# EAGLE board dueSkel (EAGLE 8.2.2)
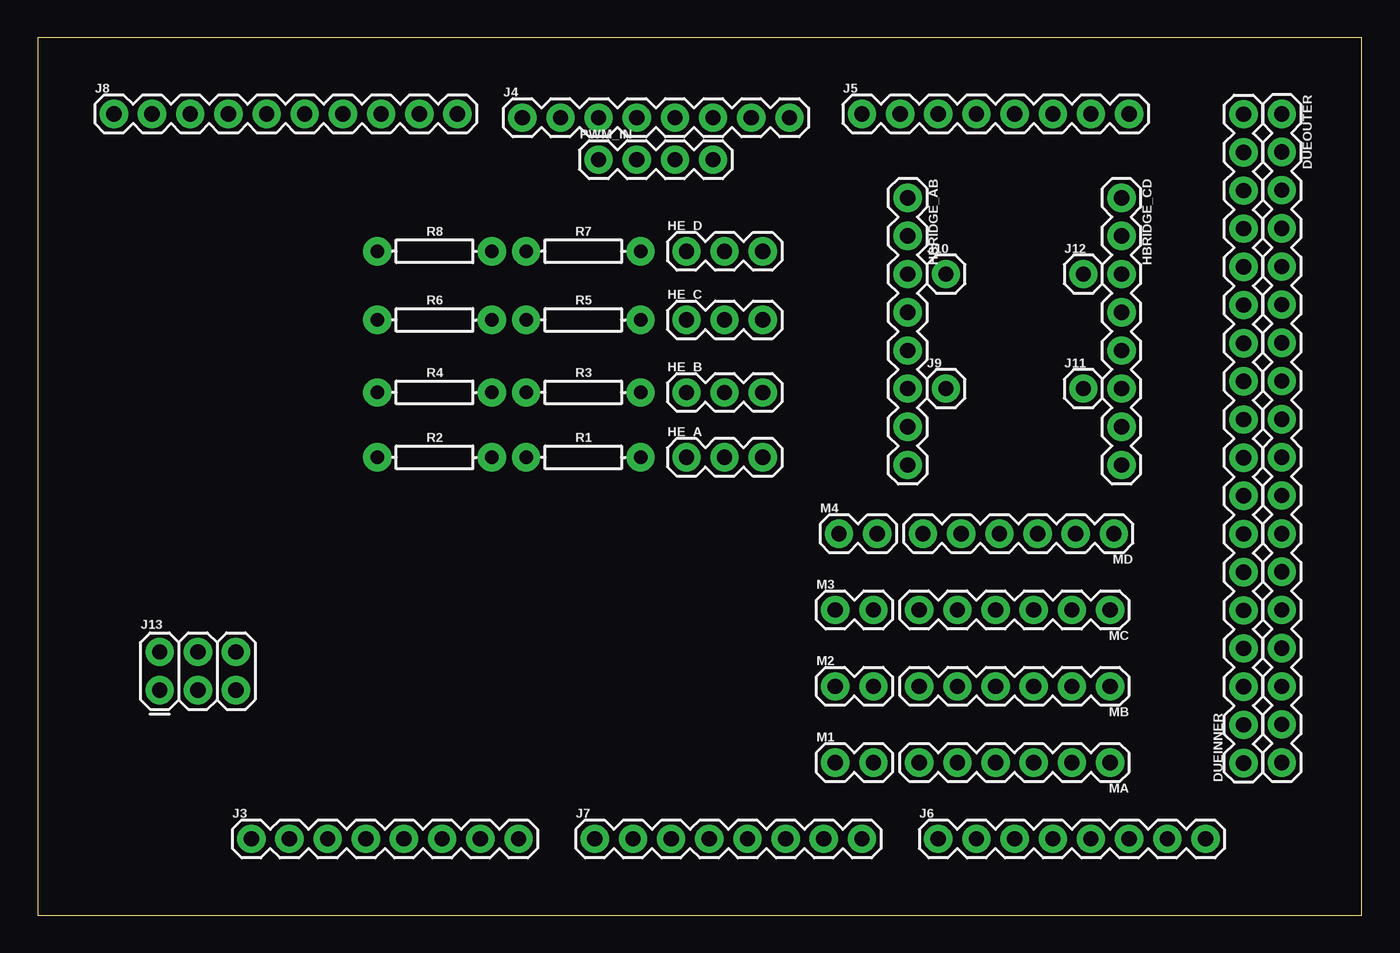
[diagram p0: board, top side]
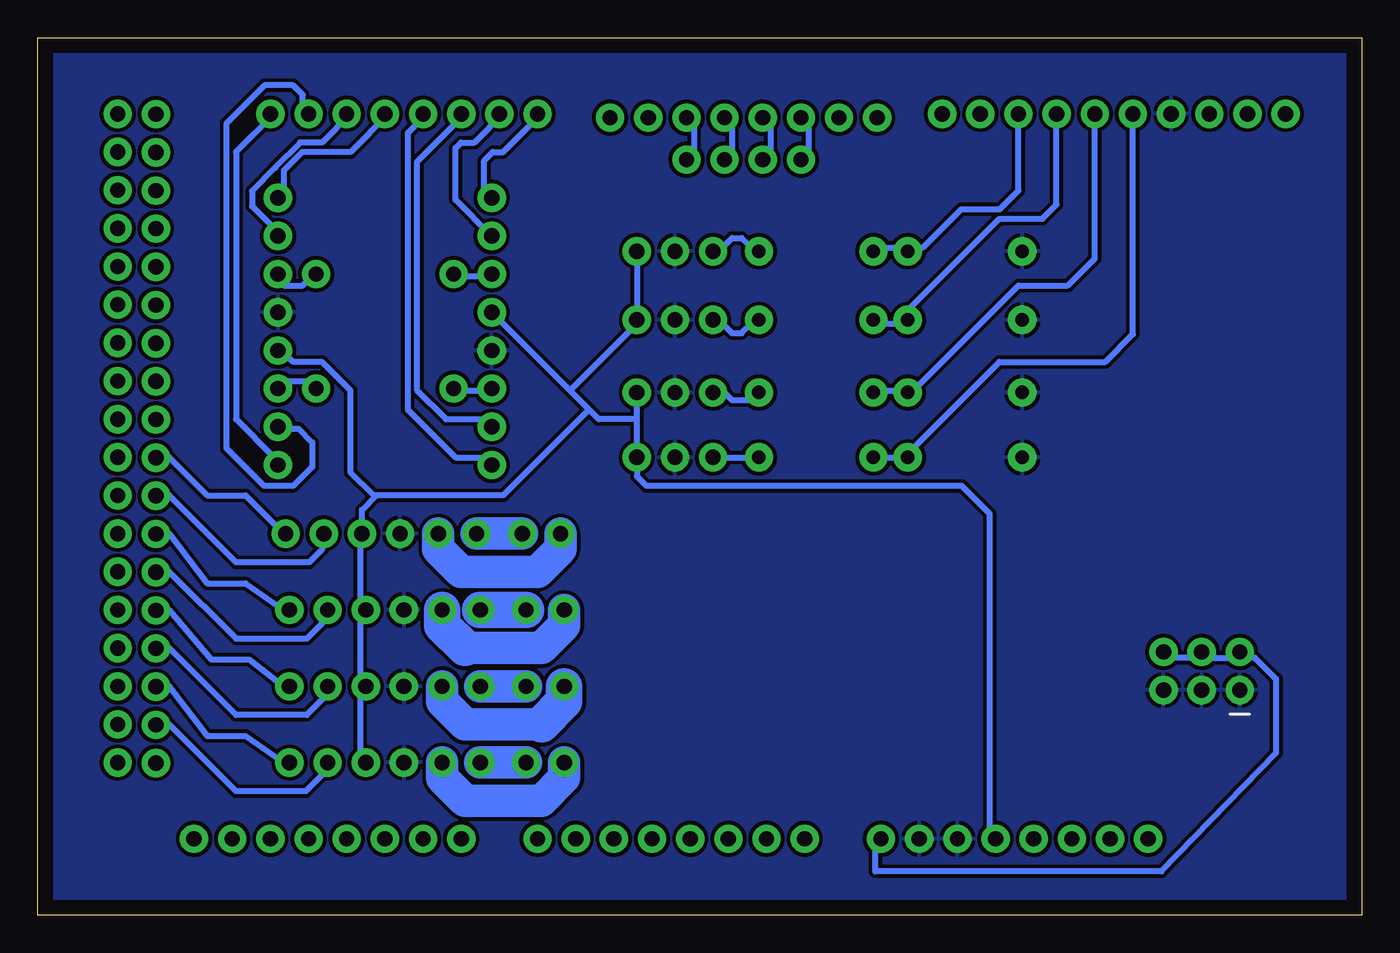
[diagram p1: board, bottom side, seen from below]

Size 88.14 x 58.42 mm. Coordinates in mm from the lower left corner, seen from the top.
Outline: 0,0 88.14,0 88.14,58.42 0,58.42 0,0
Copper layers (1*16): Top 0.035mm / dielectric 1.5mm / Bottom 0.035mm
Design rules "default *": minimum track width 16mil, minimum drill 0.35mm, track to track 6mil, track to pad 6mil, pad to pad 6mil, via to via 6mil, smd to smd 6mil, copper to edge 40mil, drill to drill 6mil, minimum pad ring 10mil, minimum via ring 8mil, stop-mask expansion 4mil, vias tented up to drill 0mil, thermal gap 10mil

## Footprints (pad centres in the part's own frame; a part is rotated, then mirrored left to right if it is on the bottom)
1X18 = drill 1.016 pad 1.88: 1 0,0; 2 2.54,0; 3 5.08,0; 4 7.62,0; 5 10.16,0; 6 12.7,0; 7 15.24,0; 8 17.78,0; 9 20.32,0; 10 22.86,0; 11 25.4,0; 12 27.94,0; 13 30.48,0; 14 33.02,0; 15 35.56,0; 16 38.1,0; 17 40.64,0; 18 43.18,0
1X08 = drill 1.016 pad 1.88: 1 0,0; 2 2.54,0; 3 5.08,0; 4 7.62,0; 5 10.16,0; 6 12.7,0; 7 15.24,0; 8 17.78,0
1X03 = drill 1.016 pad 1.88: 1 0,0; 2 2.54,0; 3 5.08,0
1X10 = drill 1.016 pad 1.88: 1 0,0; 2 2.54,0; 3 5.08,0; 4 7.62,0; 5 10.16,0; 6 12.7,0; 7 15.24,0; 8 17.78,0; 9 20.32,0; 10 22.86,0
1X01 = drill 1.016 pad 1.88: 1 0,0
2X3 = drill 1.016 pad 1.88: 1 0,0; 2 0,2.54; 3 2.54,0; 4 2.54,2.54; 5 5.08,0; 6 5.08,2.54
1X02 = drill 1.016 pad 1.88: 1 0,0; 2 2.54,0
1X06 = drill 1.016 pad 1.88: 1 0,0; 2 2.54,0; 3 5.08,0; 4 7.62,0; 5 10.16,0; 6 12.7,0
1X04 = drill 1.016 pad 1.88: 1 0,0; 2 2.54,0; 3 5.08,0; 4 7.62,0
AXIAL-0.3 = drill 0.9 pad 1.88: P$1 -3.81,0; P$2 3.81,0

## Placement (x,y rotation side)
DUEINNER  [1X18]  80.26,10.13 90 top
DUEOUTER  [1X18]  82.8,53.34 270 top
HBRIDGE_AB  [1X08]  57.91,47.75 270 top
HBRIDGE_CD  [1X08]  72.14,47.75 270 top
HE_A  [1X03]  43.18,30.48 0 top
HE_B  [1X03]  43.18,34.8 0 top
HE_C  [1X03]  43.18,39.62 0 top
HE_D  [1X03]  43.18,44.2 0 top
J3  [1X08]  14.22,5.08 0 top
J4  [1X08]  32.26,53.09 0 top
J5  [1X08]  54.86,53.34 0 top
J6  [1X08]  59.94,5.08 0 top
J7  [1X08]  37.08,5.08 0 top
J8  [1X10]  5.08,53.34 0 top
J9  [1X01]  60.45,35.05 0 top
J10  [1X01]  60.45,42.67 0 top
J11  [1X01]  69.6,35.05 0 top
J12  [1X01]  69.6,42.67 0 top
J13  FEMALE 2x3  [2X3]  8.13,14.99 0 top
M1  [1X02]  53.09,10.16 0 top
M2  [1X02]  53.09,15.24 0 top
M3  [1X02]  53.09,20.32 0 top
M4  [1X02]  53.34,25.4 0 top
MA  [1X06]  71.37,10.16 180 top
MB  [1X06]  71.37,15.24 180 top
MC  [1X06]  71.37,20.32 180 top
MD  [1X06]  71.63,25.4 180 top
PWM_IN  [1X04]  37.34,50.29 0 top
R1  10  [AXIAL-0.3]  36.32,30.48 0 top
R2  10  [AXIAL-0.3]  26.42,30.48 0 top
R3  10  [AXIAL-0.3]  36.32,34.8 0 top
R4  10  [AXIAL-0.3]  26.42,34.8 0 top
R5  10  [AXIAL-0.3]  36.32,39.62 0 top
R6  10  [AXIAL-0.3]  26.42,39.62 0 top
R7  10  [AXIAL-0.3]  36.32,44.2 0 top
R8  10  [AXIAL-0.3]  26.42,44.2 0 top

## Library data of the parts
DUEINNER DUEOUTER HE_A HE_B HE_C HE_D J9-J12 M1-M4 = SparkFun-Connectors
HBRIDGE_AB HBRIDGE_CD J3-J7 = SparkFun-Connectors; PROD_ID: CONN-08438
J8 = SparkFun-Connectors; PROD_ID: CONN-11563
J13 = SparkFun-Connectors; PROD_ID: CONN-11566
MA MB MC MD = SparkFun-Connectors; PROD_ID: CONN-08437
PWM_IN = SparkFun-Connectors; PROD_ID: CONN-09696
R1-R8 = SparkFun-Resistors; PROD_ID: RES-12180

## Nets
3.3V: J3.4
5V: HBRIDGE_AB.4 HBRIDGE_CD.5 HE_A.3 HE_B.3 HE_C.3 HE_D.3 J3.5 MA.3 MB.3 MC.3 MD.3
A0: J7.1
A1: J7.2
A2: J7.3
A3: J7.4
A4: J7.5
A5: J7.6
A6: J7.7
A7: J7.8
A8: J6.1
A9: J6.2
A10: J6.3
A11: J6.4
AREF: J8.3
CANRX: J6.7
CANTX: J6.8
D0: J4.8
D1: J4.7
D2: J4.6 PWM_IN.4
D3: J4.5 PWM_IN.3
D4: J4.4 PWM_IN.2
D5: J4.3 PWM_IN.1
D6: J4.2
D7: J4.1
D8: J8.10
D9: J8.9
D10: J8.8 R7.P$1 R8.P$2
D11: J8.7 R5.P$1 R6.P$2
D12: J8.6 R3.P$1 R4.P$2
D13: J8.5 R1.P$1 R2.P$2
D14: HBRIDGE_AB.1 J5.1
D15: HBRIDGE_AB.2 J5.2
D16: HBRIDGE_AB.7 J5.3
D17: HBRIDGE_AB.8 J5.4
D18: HBRIDGE_CD.1 J5.5
D19: HBRIDGE_CD.2 J5.6
D20: HBRIDGE_CD.7 J5.7
D21: HBRIDGE_CD.8 J5.8
D22: DUEINNER.17
D23: DUEOUTER.2
D24: DUEINNER.16
D25: DUEOUTER.3
D26: DUEINNER.15
D27: DUEOUTER.4
D28: DUEINNER.14
D29: DUEOUTER.5
D30: DUEINNER.13
D31: DUEOUTER.6
D32: DUEINNER.12
D33: DUEOUTER.7
D34: DUEINNER.11
D35: DUEOUTER.8
D36: DUEINNER.10
D37: DUEOUTER.9
D38: DUEINNER.9 MD.1
D39: DUEOUTER.10
D40: DUEINNER.8 MD.2
D41: DUEOUTER.11
D42: DUEINNER.7 MC.1
D43: DUEOUTER.12
D44: DUEINNER.6 MC.2
D45: DUEOUTER.13
D46: DUEINNER.5 MB.1
D47: DUEOUTER.14
D48: DUEINNER.4 MB.2
D49: DUEOUTER.15
D50: DUEINNER.3 MA.1
D51: DUEOUTER.16
D52: DUEINNER.2 MA.2
D53: DUEOUTER.17
DAC0: J6.5
DAC1: J6.6
GND: HBRIDGE_AB.5 HBRIDGE_CD.4 HE_A.2 HE_B.2 HE_C.2 HE_D.2 J3.6 J3.7 J8.4 J13.1 J13.3 J13.5 MA.4 MB.4 MC.4 MD.4 R2.P$1 R4.P$1 R6.P$1 R8.P$1
HB1_PWM1: HBRIDGE_AB.6 J9.1
HB1_PWM2: HBRIDGE_AB.3 J10.1
HB2_PWM1: HBRIDGE_CD.6 J11.1
HB2_PWM2: HBRIDGE_CD.3 J12.1
IOREF: J3.2
M1A: M1.2 MA.6
M1B: M1.1 MA.5
M2A: M2.2 MB.6
M2B: M2.1 MB.5
M3A: M3.2 MC.6
M3B: M3.1 MC.5
M4A: M4.2 MD.6
M4B: M4.1 MD.5
N$3: HE_A.1 R1.P$2
N$6: HE_B.1 R3.P$2
N$9: HE_C.1 R5.P$2
N$12: HE_D.1 R7.P$2
RESET: J3.3
SCL1: J8.1
SDA1: J8.2
VIN: J3.8 J13.2 J13.4 J13.6

## Tracks (layer width: path | path; a pad name or v marks a point on that pad's centre or on a via)
5V
  Bottom 0.406: 66.67,15.24 66.67,10.16 MA.3 | 66.67,20.32 66.67,25.4 MD.3 66.55,26.98 | HBRIDGE_CD.5 71.75,37.46 71.12,36.83 69.21,36.83 67.31,34.92 67.31,29.48 65.79,27.96 65.79,27.94 65.6,27.94 | 66.67,20.32 66.67,15.24 | 66.67,15.24 MB.3 | 66.67,20.32 MC.3 | HE_D.3 HE_C.3 48.26,39.37 52.71,34.92 | J3.5 24.77,5.08 24.77,26.72 26.62,28.57 47.62,28.57 48.26,29.21 HE_A.3 48.26,33.02 | 48.26,33.02 HE_B.3 | 51.44,33.65 50.8,33.02 48.26,33.02 | 51.44,33.65 52.71,34.92 | 52.71,34.92 HBRIDGE_AB.4 | 65.6,27.94 57.15,27.94 51.44,33.65 | 66.55,26.98 65.6,27.94 | 66.55,26.98 | 66.55,26.98
D2
  Bottom 0.406: PWM_IN.4 44.45,50.8 44.45,52.7 J4.6
D3
  Bottom 0.406: PWM_IN.3 41.91,50.8 41.91,52.7 J4.5
D4
  Bottom 0.406: PWM_IN.2 39.37,50.8 39.37,52.7 J4.4
D5
  Bottom 0.406: PWM_IN.1 36.83,50.8 36.83,52.7 J4.3
D10
  Bottom 0.406: R7.P$1 32.38,44.45 30.48,44.45 R8.P$2 29.84,44.45 29.21,44.45 26.67,46.99 24.11,46.99 22.86,48.24 J8.8
D11
  Bottom 0.406: R5.P$1 32.38,39.37 30.48,39.37 R6.P$2 30.48,40 24.13,46.35 21.26,46.35 20.32,47.3 J8.7
D12
  Bottom 0.406: R3.P$1 32.38,34.92 30.48,34.92 R4.P$2 29.84,34.92 22.86,41.91 19.57,41.91 17.78,43.7 J8.6
D13
  Bottom 0.406: R1.P$1 30.48,30.48 | J8.5 15.24,38.67 17.08,36.83 24.13,36.83 30.48,30.48 | 30.48,30.48 R2.P$2
D14
  Bottom 0.406: HBRIDGE_AB.1 58.42,48.26 58.42,50.23 57.85,50.8 57.15,50.8 54.61,53.34 J5.1
D15
  Bottom 0.406: HBRIDGE_AB.2 60.33,47.62 60.33,51.07 59.96,51.43 59.05,51.43 57.15,53.34 J5.2
D16
  Bottom 0.406: HBRIDGE_AB.7 58.42,33.02 60.96,33.02 62.87,34.92 62.87,50.16 59.69,53.34 J5.3
D17
  Bottom 0.406: HBRIDGE_AB.8 58.42,30.48 60.33,30.48 63.5,33.65 63.5,52.07 62.23,53.34 J5.4
D18
  Bottom 0.406: HBRIDGE_CD.1 71.75,48.26 71.75,49.56 70.52,50.8 67.31,50.8 64.77,53.34 J5.5
D19
  Bottom 0.406: HBRIDGE_CD.2 72.39,45.72 73.86,47.19 73.86,48.21 72.31,49.76 72.31,49.79 70.67,51.43 69.21,51.43 67.31,53.34 J5.6
D20
  Bottom 0.406: J5.7 70.48,53.34 70.48,54.61 70.5,54.61 71.14,55.24 73.02,55.24 75.56,52.7 75.56,31.08 73.06,28.57 71.12,28.57 69.85,29.84 69.85,31.47 70.77,32.38 71.75,32.38 HBRIDGE_CD.7
D21
  Bottom 0.406: HBRIDGE_CD.8 72.39,30.48 74.93,33.02 74.93,50.82 73.68,52.07 73.66,52.07 72.39,53.34 J5.8
D38
  Bottom 0.406: MD.1 71.75,25.4 74.3,27.94 76.83,27.94 79.38,30.48 80.01,30.48 DUEINNER.9
D40
  Bottom 0.406: MD.2 69.21,25.4 69.21,24.36 70.08,23.5 74.93,23.5 79.38,27.94 80.01,27.94 DUEINNER.8
D42
  Bottom 0.406: MC.1 71.75,20.32 74.3,22.1 76.83,22.1 79.38,25.4 80.01,25.4 DUEINNER.7
D44
  Bottom 0.406: MC.2 69.21,20.32 69.21,19.41 70.21,18.41 74.93,18.41 79.38,22.86 80.01,22.86 DUEINNER.6
D46
  Bottom 0.406: MB.1 71.75,15.24 74.04,17.02 76.58,17.02 79.38,20.32 80.01,20.32 DUEINNER.5
D48
  Bottom 0.406: DUEINNER.4 80.01,17.78 79.38,17.78 74.93,13.34 70.23,13.34 68.83,14.73 MB.2
D50
  Bottom 0.406: MA.1 71.75,10.16 74.3,11.94 76.83,11.94 79.38,15.24 80.01,15.24 DUEINNER.3
D52
  Bottom 0.406: DUEINNER.2 80.01,12.7 79.38,12.7 74.93,8.26 70.29,8.26 68.83,9.71 MA.2
GND
  pour Bottom (isolate 0.254): 0,58.42 0,0 88.14,0 88.14,58.42
HB1_PWM1
  Bottom 0.406: HBRIDGE_AB.6 58.42,34.92 60.33,34.92 J9.1
HB1_PWM2
  Bottom 0.406: HBRIDGE_AB.3 58.42,42.54 60.33,42.54 J10.1
HB2_PWM1
  Bottom 0.406: J11.1 69.85,35.56 71.75,35.56 HBRIDGE_CD.6
HB2_PWM2
  Bottom 0.406: J12.1 69.85,42.54 70.48,41.91 71.75,41.91 72.39,42.54 HBRIDGE_CD.3
M1A
  Bottom 2.159: M1.2 MA.6
M1B
  Bottom 2.159: M1.1 53.09,9.14 54.61,7.62 59.69,7.62 61.21,9.14 MA.5
M2A
  Bottom 2.159: M2.2 MB.6
M2B
  Bottom 2.159: MB.5 61.21,14.22 59.69,12.7 54.61,12.7
  Bottom 2.413: M2.1 53.09,14.22 54.61,12.7
M3A
  Bottom 2.413: M3.2 MC.6
M3B
  Bottom 2.159: M3.1 53.09,19.3 54.61,17.78 59.69,17.78
  Bottom 2.413: MC.5 61.21,19.3 59.69,17.78
M4A
  Bottom 2.159: M4.2 MD.6
M4B
  Bottom 2.159: M4.1 53.34,24.38 54.86,22.86 59.94,22.86 61.47,24.38 MD.5
N$3
  Bottom 0.406: HE_A.1 R1.P$2
N$6
  Bottom 0.406: R3.P$2 40.64,34.29 41.91,34.29 42.55,34.92 43.18,34.92 HE_B.1
N$9
  Bottom 0.406: R5.P$2 40.64,39.37 41.28,38.73 41.91,38.73 42.55,39.37 43.18,39.37 HE_C.1
N$12
  Bottom 0.406: R7.P$2 40.64,44.45 41.28,45.08 41.91,45.08 42.55,44.45 43.18,44.45 HE_D.1
VIN
  Bottom 0.406: J13.6 12.7,17.14 10.79,17.14 J13.4 10.16,17.14 8.26,17.14 J13.2 7.62,17.14 7.12,17.14 5.72,15.75 5.71,15.75 5.71,10.79 13.33,2.92 32.38,2.92 32.38,5.08 J3.8